# Altium PCB BMD101newconst.PcbDoc
Units mil, origin at the board's own origin, x right, y up, seen from the top; angles counter-clockwise.
Board outline 3995 x 1600 mil, 2 copper layers (Top Layer, Bottom Layer); 42 components, 23 nets, 132 pads, 10 vias.
Unrouted connection lines stored in the file: 3.
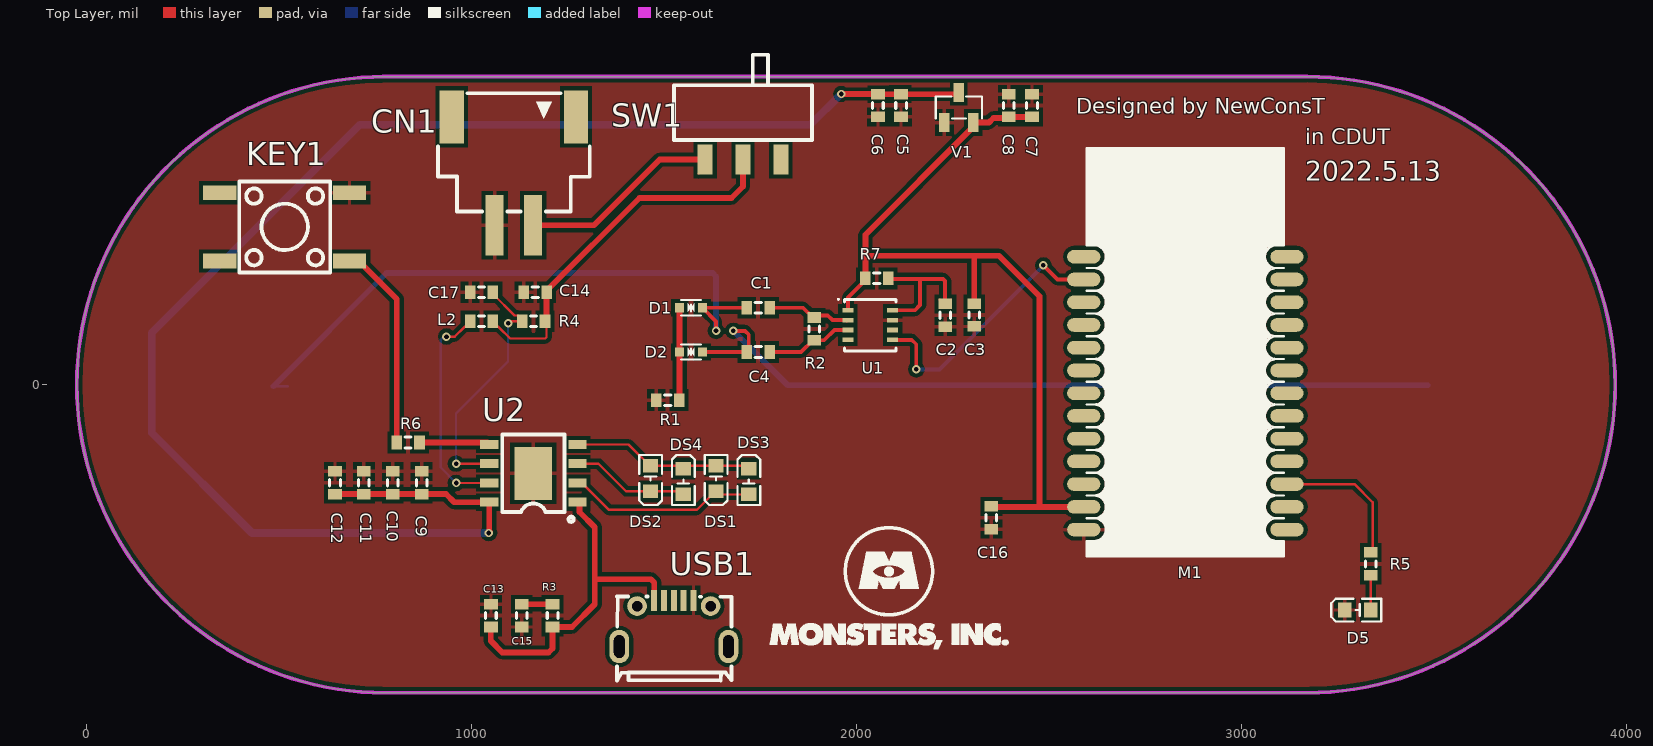
[diagram p0: Top Layer view]
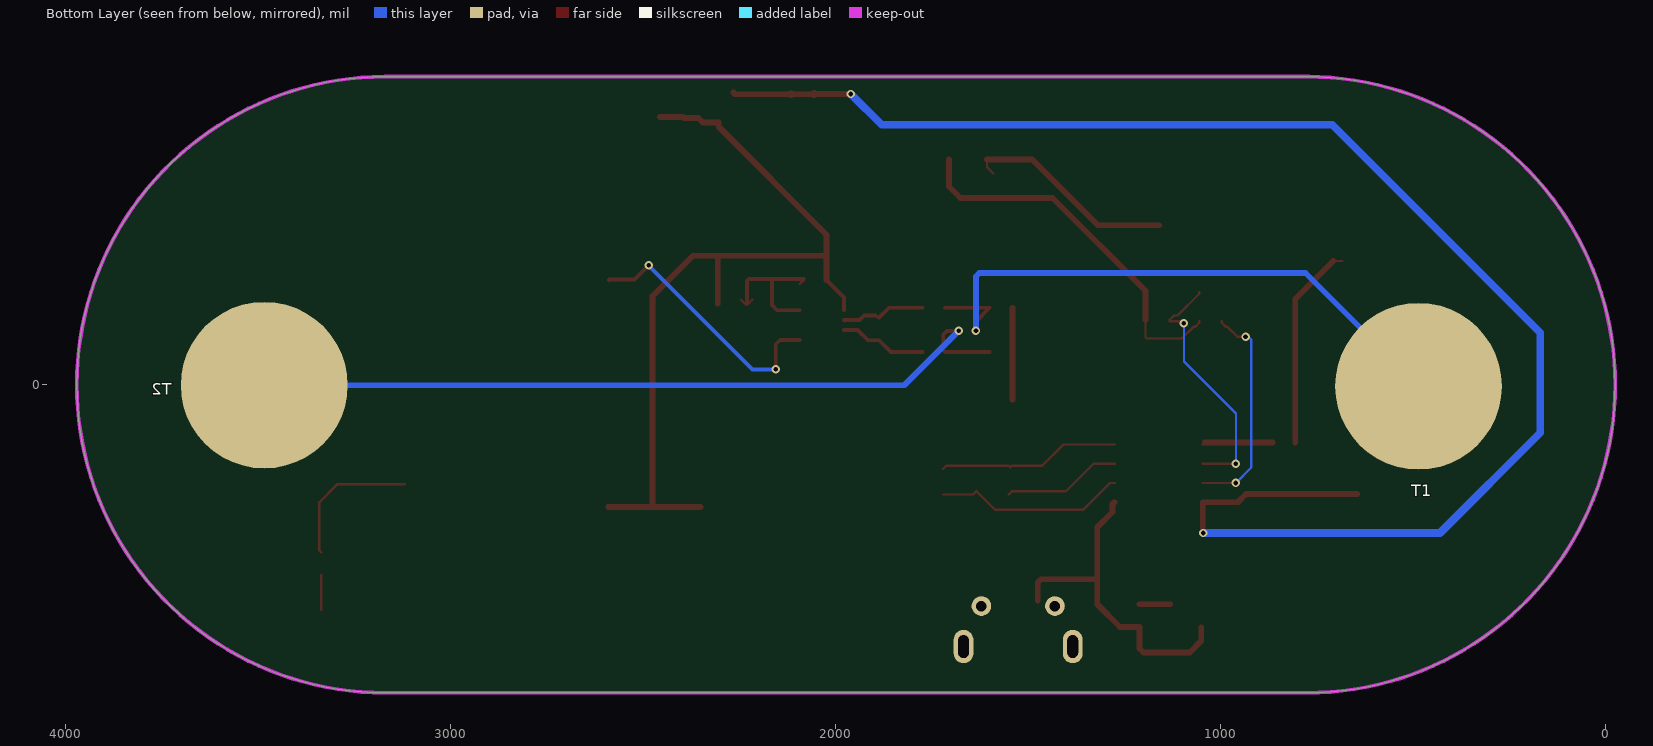
[diagram p1: Bottom Layer view, seen from below]

## Layer stack, top to bottom
Top Solder: solder mask 0.4, Solder Resist, Dk 3.5
Top Layer: signal copper 1.4
Dielectric 1: dielectric 12.6, FR-4, Dk 4.8
Bottom Layer: signal copper 1.4
Bottom Solder: solder mask 0.4, Solder Resist, Dk 3.5

## Board outline
775,-800 cw(c775,0) 775,800 3170,800 cw(c3170,0) 3170,-800

## Design rules (kind name [scope] priority, off if disabled: settings)
Clearance [All] p1: gap=10 ignorepadtopadclearanceinfootprint=TRUE
PolygonConnect [All] p1: thpad.connectstyle=Relief thpad.reliefconductorwidth=10 thpad.reliefentries=4 thpad.polygonreliefangle="90 Angle" thpad.airgapwidth=10 smdpad.connectstyle=Relief smdpad.reliefconductorwidth=10 smdpad.reliefentries=4 smdpad.polygonreliefangle="90 Angle" smdpad.airgapwidth=10 via.connectstyle=Direct via.reliefconductorwidth=10 via.reliefentries=4 via.polygonreliefangle="90 Angle" via.airgapwidth=10
RoutingVias [All] p1: holewidth=12 width=22 viastyle="Through Hole" minholewidth=12 minwidth=22 maxholewidth=12 maxwidth=22
ShortCircuit [InNet('No Net') vs InNet('No Net')] p1: allowed=FALSE
SilkToSilkClearance [All] p1: silktosilkclearance=2
SilkToSolderMaskClearance [IsPad] p1: minsilkscreentomaskgap=2 clearancetoexposedcopper=TRUE
SolderMaskExpansion [All] p1: expansion=4 istentingtop=FALSE
Width 5V [InNet('+5')] p1: maxlimit=20 minlimit=10 preferedwidth=20 minimp=50.000000 maximp=50.000000 favimp=50.000000
Width AGND [InNet('AGND')] p2: maxlimit=15 minlimit=10 preferedwidth=15 minimp=50.000000 maximp=50.000000 favimp=50.000000
Width 3.3v [InNet('+3.3V')] p3: maxlimit=15 minlimit=10 preferedwidth=15 minimp=50.000000 maximp=50.000000 favimp=50.000000
Width PWR [InNetClass('PWR')] p4: maxlimit=50 minlimit=15 preferedwidth=15
Width [All] p5: maxlimit=15 minlimit=6 preferedwidth=6
27 further rules are at their usual default settings.

## Components (designator, comment, footprint, x,y, rotation, side; value= is the part's Value field where it differs from the comment)
C1 "Cap" J1-0603 1744.53,200 r0 top value=1uF
C2 "Cap" J1-0603 2230.47,180.47 r90 top value=10uF
C3 "Cap" J1-0603 2305.47,180.94 r90 top value=10uF
C4 "Cap" J1-0603 1744.53,85 r0 top value=1uF
C5 "25V/106" J1-0603 2115.47,725.01 r90 top value=106
C6 "104" J1-0603 2055.47,725 r270 top value=104/0.1uF
C7 "104" J1-0603 2455.47,725.01 r90 top value=104/0.1uF
C8 "25V/106" J1-0603 2395.47,725 r270 top value=106
C9 "22uF" J1-0603 870.47,-254.53 r270 top
C10 "22uF" J1-0603 795.47,-254.53 r270 top
C11 "22uF" J1-0603 720.47,-254.53 r270 top
C12 "22uF" J1-0603 645.47,-254.53 r270 top
C13 "10uF" J1-0603 1050.47,-599.53 r270 top
C14 "22uF" J1-0603 1165.47,240 r0 top
C15 "10uF" J1-0603 1130.47,-599.53 r90 top
C16 "Cap" J1-0603 2350,-345.47 r90 top value=1uF
C17 "22uF" J1-0603 1025.94,240 r0 top
CN1 "2.54-2P WT" CONN-SMD_2.54-2PWT 1110,555 r180 top
D1 "ESD5V0LB-TP" ESD5V0D5B 1570,200 r0 top
D2 "ESD5V0LB-TP" ESD5V0D5B 1570,85 r180 top
D5 "LED2" LED0603-FD 3301.54,-585 r180 top
DS1 "LED1" LED0603-FD 1635,-243.46 r270 top
DS2 "LED1" LED0603-FD 1465,-243.46 r270 top
DS3 "LED1" LED0603-FD 1720,-251.34 r90 top
DS4 "LED1" LED0603-FD 1550,-251.34 r90 top
KEY1 "K2-1102SP-C4SC-04" KEY-SMD_4P-L6.0-W6.0-P4.50-LS9.5-BL 515,410 r90 top
L2 "Inductor" J1-0603 1025.94,165 r0 top value=1UH
M1 "HC-08" HC-08 2853.78,-445.12 r90 top
R1 "10K" J1-0603 1509.53,-40 r180 top value=0
R2 "Res2" J1-0603 1890.47,145 r90 top value=10K
R3 "2R" J1-0603 1210.47,-599.53 r90 top
R4 "0.5R" J1-0603 1161.42,165 r0 top
R5 "Res2" J1-0603 3335,-465 r90 top value=2.2K
R6 "10K" J1-0603 835.47,-150 r180 top
R7 "10K" J1-0603 2052.33,276.15 r180 top value=0
SW1 "SK-3245S-L1-A" SW-SMD_SK-3245S-L1-A-1 1705.01,585 r0 top
T1 "pad" BATOO#1 485.74,-3.85 r180 bottom
T2 "pad" BATOO#2 3483.14,-1.15 r270 top
U1 "NS BMD101" BMD101 2035.47,155 r0 top
U2 "IP5306" ip5306 1160.47,-230 r90 top
USB1 "MICROUSB" MICRO-USB-SMD_MICROXNJ 1525.47,-620 r0 top
V1 "662K." 662K 2265.47,720 r270 top

## Footprints (in the part's own frame and the unit in brackets; to place one, negate y for a bottom-side part, rotate by r counter-clockwise, add the part's x,y. Pads: shape width x height; smd on the part's side, far side on the other; paste and mask are expansions set on the pad)
662K [mm] "3.3VLDO"
  rect 1.25x0.7 smd: 1(1,-0.95) 2(1,0.95) 3(-1,0)
  silkscreen extent -0.73,-1.53 0.73,1.53
BATOO#1 [mm] "焊接心率纽扣"
  round 11 smd: 1(0,0)
BATOO#2 [mm] "焊接心率纽扣"
  round 11 smd far side: 1(0,0)
BMD101 [mm] "SON, 8-Leads, Body 3.00x3.00mm, Pitch 0.65mm, IPC Medium Density"
  rect 0.75x0.3 smd: 1(-1.47,0.975) 2(-1.47,0.325) 3(-1.47,-0.325) 4(-1.47,-0.975) 5(1.47,-0.975) 6(1.47,-0.325) 7(1.47,0.325) 8(1.47,0.975)
  silkscreen extent -2.15,-1.7 1.7,1.75, body extent -1.55,-1.55 1.55,1.55, height 0.6
CONN-SMD_2.54-2PWT [mm]
  rect 1.2x4 smd: 1(-1.27,3.577) 2(1.27,3.577)
  rect 1.6x3.5 smd: 3(4.1,-3.577) 4(-4.1,-3.577)
  silkscreen extent -5,-5.13 5,2.67
ESD5V0D5B [mm]
  rect 0.6x0.6 smd: 1(-0.75,0) 2(0.75,0)
  silkscreen extent -0.65,-0.5 0.65,0.5
HC-08 [mm] "BLE蓝牙模块"
  oval 0.9x2.2 smd: 1(19.75,6.7) 2(18.25,6.7) 3(16.75,6.7) 4(15.25,6.7) 5(13.75,6.7) 6(12.25,6.7) 7(10.75,6.7) 8(9.25,6.7) 9(7.75,6.7) 10(6.25,6.7) 11(4.75,6.7) 12(3.25,6.7) 13(1.75,6.7) 14(1.75,-6.7) 15(3.25,-6.7) 16(4.75,-6.7) 17(6.25,-6.7) 18(7.75,-6.7) 19(9.25,-6.7) 20(10.75,-6.7) 21(12.25,-6.7) 22(13.75,-6.7) 23(15.25,-6.7) 24(16.75,-6.7) 25(18.25,-6.7) 26(19.75,-6.7)
  silkscreen extent -0.01,-6.5 26.9,6.5
ip5306 [mm] "5v2.4A锂电池管理"
  rect 0.6x1.2 smd: 1(-1.905,-2.908) 2(-0.635,-2.908) 3(0.635,-2.908) 4(1.905,-2.908) 5(1.905,2.908) 6(0.635,2.908) 7(-0.635,2.908) 8(-1.905,2.908)
  rect 3.5x2.5 smd: 9(0,0)
  silkscreen extent -3.2,-2.67 2.55,2.05
J1-0603 [mm] "Chip Resistor, Body 1.6x0.8mm, IPC High Density"
  rect 0.7x0.9 smd: 1(-0.75,0) 2(0.75,0)
  silkscreen extent -0.2,-0.35 0.2,0.35, body extent -0.85,-0.48 0.85,0.48, height 0.9
KEY-SMD_4P-L6.0-W6.0-P4.50-LS9.5-BL [mm]
  rect 0.98x2.2 smd: 1(-2.25,-4.275) 2(-2.25,4.275) 3(2.25,-4.275) 4(2.25,4.275)
  silkscreen extent -3,-3 3,3
LED0603-FD [mm]
  rect 0.9x1 smd: 1(-0.85,0) 2(0.85,0)
  silkscreen extent -1.55,-0.75 1.75,0.75
MICRO-USB-SMD_MICROXNJ [mm]
  rect 0.4x1.4 smd: 1(-1.3,1.521) 2(-0.65,1.521) 3(0,1.521) 4(0.65,1.521) 5(1.3,1.521)
  round 1.3 hole 0.7: 6(2.425,1.149) 9(-2.425,1.149)
  oval 1.3x2.2 hole 0.7 slot 1.5 at 90 deg: 7(3.6,-1.521) 8(-3.6,-1.521)
  silkscreen extent -3.76,-3.78 3.8,1.79
SW-SMD_SK-3245S-L1-A-1 [mm] "卧式三脚开关"
  rect 1x2 smd: 1(-2.5,0) 2(0,0) 3(2.5,0)
  silkscreen extent -4.55,1.29 4.55,6.9

## Part data
C1 C2 C3 C4 C16: "Capacitor", LatestRevisionDate=17-Jul-2002, LatestRevisionNote="Re-released for DXP Platform.", PackageDescription="Radial Cap, Thru-Hole; 2 Leads; 0.3 in Pin Spacing", PackageReference=RAD-0.3, Published=8-Jun-2000, Publisher="Altium Limited"
C5 C6 C7 C8: library part Cap, "Capacitor", LatestRevisionDate=17-Jul-2002, LatestRevisionNote="Re-released for DXP Platform.", PackageDescription="Radial Cap, Thru-Hole; 2 Leads; 0.3 in Pin Spacing", PackageReference=RAD-0.3, Published=8-Jun-2000, Publisher="Altium Limited"
C9 C10 C11 C12 C13 C14 C15 C17: library part C_22, "0805"
CN1: BOM_JLCPCB Part Class="Extended Part", BOM_Manufacturer="SHOU HAN", BOM_Manufacturer Part="2.54-2P WT", BOM_Supplier=LCSC, BOM_Supplier Part=C668622, Contributor=LCSC, spicePre=C, spiceSymbolName="2.54-2P WT"
D1 D2: BOM_JLCPCB Part Class="Extended Part", BOM_Manufacturer="MCC(Micro Commercial Components)", BOM_Manufacturer Part=ESD5V0LB-TP, BOM_Supplier=LCSC, BOM_Supplier Part=C668927, Contributor=LCSC, JLCPCB Part Class="Extended Part", spicePre=D, spiceSymbolName=ESD5V0LB-TP
D5: "Typical RED, GREEN, YELLOW, AMBER GaAs LED", LatestRevisionDate=17-Jul-2002, LatestRevisionNote="Re-released for DXP Platform.", PackageDescription="SM LED; 2 Flat Leads", PackageReference=3.2X1.6X1.1, PackageVersion=Feb-2002, Published=8-Jun-2000, Publisher="Altium Limited"
DS1 DS2 DS3 DS4: library part LED2, "Typical RED, GREEN, YELLOW, AMBER GaAs LED", PackageDocument=Feb-2002, LatestRevisionDate=17-Jul-2002, LatestRevisionNote="Re-released for DXP Platform.", PackageReference=3.2X1.6X1.1, Published=8-Jun-2000, Publisher="Altium Limited"
KEY1: BOM_JLCPCB Part Class="Extended Part", BOM_Manufacturer=HRO, BOM_Manufacturer Part=K2-1102SP-C4SC-04, BOM_Supplier=LCSC, BOM_Supplier Part=C127509, Contributor=LCSC, spicePre=S, spiceSymbolName=K2-1102SP-C4SC-04
M1: "BLE蓝牙通信模块"
R1 R7: library part Res2, "Resistor", LatestRevisionDate=17-Jul-2002, LatestRevisionNote="Re-released for DXP Platform.", PackageDescription="Axial Device, Thru-Hole; 2 Leads; 0.4 in Pin Spacing", PackageReference=AXIAL-0.4, Published=8-Jun-2000, Publisher="Altium Limited"
R2 R5: "Resistor", LatestRevisionDate=17-Jul-2002, LatestRevisionNote="Re-released for DXP Platform.", PackageDescription="Axial Device, Thru-Hole; 2 Leads; 0.4 in Pin Spacing", PackageReference=AXIAL-0.4, Published=8-Jun-2000, Publisher="Altium Limited"
R3 R4 R6: library part R_2
SW1: "卧式滑动开关", BOM_JLCPCB Part Class="Extended Part", BOM_Manufacturer="XKB Enterprise", BOM_Manufacturer Part=SK-3245S-L1-A, BOM_Supplier=LCSC, BOM_Supplier Part=C405951, Contributor=LCSC, spicePre=S, spiceSymbolName=SK-3245S-L1-A
T1 T2: library part BATOO
U1: library part BMD101, "NeuroSky心率芯片"
U2: "SOP8"
USB1: library part MICROusb, BOM_JLCPCB Part Class="Extended Part", BOM_Manufacturer="SHOU HAN", BOM_Manufacturer Part=MicroXNJ, BOM_Supplier=LCSC, BOM_Supplier Part=C404969, Contributor=LCSC, spicePre=U, spiceSymbolName=MICROXNJ
V1: BOM_JLCPCB Part Class="Extended Part", BOM_Manufacturer="Shenzhen Fuman Elec", BOM_Manufacturer Part=662K., BOM_Supplier=LCSC, BOM_Supplier Part=C841298, Contributor=LCSC, spicePre=U, spiceSymbolName=662K.
L2: Code_IEC=1005, Code_JEITA=0402, LatestRevisionDate=29-May-2009, LatestRevisionNote="IPC-7351 Footprint Added.", PackageDescription="Chip Inductor", PackageReference=0402-A, Published=8-Jun-2000, Publisher="Altium Limited"

## Via types
v1: diameter 22, hole 12, Top Layer to Bottom Layer, tented both sides, 10 vias

## Nets (pads, with @x,y where several pads share a name; then routed paths per layer and width w, separated by ;. In a path a pad name is that pad's centre, name@x,y a point inside that pad or via, vN(x,y) a via of type N, cw(c..) or ccw(c..) an arc to the next point about the centre after c; other vN are vias at no path point)
+3.3V: C3.2 C7.1 C8.2 C16.2 M1.12 R7.2 U1.1 V1.2 | length 2188.1
  Top Layer w10: U1.1 1977.6,227.01 R7.2@2022.8,272.21
  Top Layer w15: R7.2@2022.8,272.21 R7.2 2022.8,335 ; C3.2 2305.47,335 ; C16.2@2350,-317.16 2475,-317.16 ; C8.2 2392.96,692.96 2355.26,692.96 2342.92,680.63 V1.2 2302.87,669.8 2022.8,389.73 2022.8,335 ; C8.2 C7.1 ; M1.12 2475,-317.16 ; 2022.8,335 2305.47,335 ; 2305.47,335 2370,335 2475,230 2475,-317.16
+5: C5.2 C6.1 C9.2 C10.2 C11.2 C12.2 U2.8 V1.3 | length 4086.8
  Top Layer w15: C12.2 C11.2 C10.2 C9.2 934.06,-284.06 955,-305 U2.8 v1@1045.97,-383.49 ; v1@1960.24,754.76 C6.1@2055.24,754.76 ; C6.1 C5.2 2260.64,754.53 V1.3
  Top Layer w20: v1(1045,-385) 1045,-384.46 v1@1045.97,-383.49 ; v1(1960,755) v1@1960.24,754.76 ; C6.1@2055.24,754.76 C6.1
  Bottom Layer w20: v1(1045,-385) 430,-385 170,-125 170,135 710,675 1880,675 v1(1960,755)
AGND: D1.1 D2.2 R1.1 | length 125.6
  Top Layer w6: R1.1 R1.1@1540.47,-38.58
  Top Layer w15: R1.1@1540.47,-38.58 D2.2
B_3.7V: CN1.1 SW1.1 | length 560.6
  Top Layer w6: SW1.1@1589.9,548.63 1606.59,565.32 SW1.1
  Top Layer w15: CN1.1 1318.03,414.17 1488.86,585 SW1.1
GND: C2.1 C3.1 C5.1 C6.2 C7.2 C8.1 C9.1 C10.1 C11.1 C12.1 C13.1 C14.1 C15.1 C16.1 C17.1 CN1.2 D5.2 KEY1.3 M1.13 R1.2 U1.7 U2.9 USB1.5 V1.1
NetC1_1: C1.1 D1.2 T1.1 | length 1643.4
  Top Layer w10: v1(1635,140) 1635,164.53 D1.2 C1.1
  Bottom Layer w6: T1.1 T1.1@523.11,-3.85
  Bottom Layer w15: T1.1 779.59,290 1626.21,290 1635,281.21 v1(1635,140)
NetC1_2: C1.2 R2.2 U1.2 | length 225.4
  Top Layer w6: R2.2@1886.53,174.53 R2.2 R2.2@1895.94,180 ; U1.2@1974.8,165 U1.2
  Top Layer w10: C1.2 1861.06,200 R2.2@1886.53,174.53 ; R2.2@1895.94,180 1925,180 1937.2,167.8 U1.2
NetC2_2: C2.2 R7.1 U1.8 | length 411.5
  Top Layer w6: R7.1 2081.86,272.21 R7.1@2092.64,261.43 ; C2.2@2215.76,220.78 2226.53,210 2234.22,210 C2.2@2245,220.78
  Top Layer w10: R7.1@2083.01,275 2165,275 ; U1.8 2151.47,193.39 2165,206.92 2165,275 ; C2.2 2230,210.47 2230,269.14 2224.14,275 2165,275
NetC4_1: C4.1 D2.1 T2.1 | length 2068.3
  Top Layer w6: C4.1 C4.1@1720,90
  Top Layer w10: D2.1 C4.1 ; v1(1680,140) 1710,140 1720,130 C4.1@1720,90
  Bottom Layer w15: v1(1680,140) 1821.15,-1.15 T2.1
NetC4_2: C4.2 R2.1 U1.3 | length 227.2
  Top Layer w6: R2.1@1886.53,115.47 R2.1
  Top Layer w10: C4.2 1856.06,85 R2.1@1886.53,115.47 ; R2.1 1915.47,115.47 1942.2,142.2 U1.3
NetC13_2: C13.2 R3.1 U2.1 USB1.1 | length 891.3
  Top Layer w6: C13.2@1050,-629.53 C13.2
  Top Layer w15: C13.2@1050,-629.53 1050,-665 1080,-695 1200,-695 1210,-685 R3.1@1210,-629.53 ; R3.1 1260.94,-629.06 1320,-570 1320,-505 ; U2.1 1276.21,-305 1280.52,-309.31 1280.52,-330.52 1320,-370 1320,-505 ; USB1.1 1474.66,-559.73 1474.66,-513.79 1465.88,-505 1320,-505
NetC14_2: C14.2 L2.2 R4.2 SW1.2 | length 974.6
  Top Layer w6: L2.2 1055.47,161.06 1066.25,150.28 1070.19,150.28 1100.47,120 1191.49,120 1195,123.51 R4.2@1195,169.06 ; C14.2 C14.2@1195,243.94
  Top Layer w15: R4.2@1195,169.06 C14.2 ; C14.2@1195,243.94 1436.06,485 1675,485 1705,515 SW1.2
NetC15_2: C15.2 R3.2 | length 80
  Top Layer w15: C15.2 R3.2
NetC17_2: C17.2 R4.1 U2.6 | length 662.5
  Top Layer w6: v1(960,-205) U2.6 ; C17.2 1055.47,236.06 1111.82,179.72 1121.11,179.72 1131.89,168.94 R4.1 1100,165 v1(1095,160)
  Bottom Layer w6: v1(960,-205) 960,-75 1095,60 v1@1095,164.52
NetD5_1: D5.1 R5.1 | length 90.5
  Top Layer w6: D5.1 R5.1
NetDS1_1: DS1.1 DS2.1 DS3.2 DS4.2 U2.4 | length 474.3
  Top Layer w6: U2.4 1408.03,-155 1463.03,-210 DS2.1 1542.13,-210 1546.06,-213.94 1550,-210 DS1.1 1712.13,-210 DS3.2
NetDS1_2: DS1.2 DS3.1 U2.2 | length 497.2
  Top Layer w6: U2.2 1286.78,-255 1356.78,-325 1584.96,-325 1633.03,-276.93 DS1.2 1642.87,-284.8 DS3.1
NetDS2_2: DS2.2 DS4.1 U2.3 | length 308.1
  Top Layer w6: U2.3 1330,-205 1401.93,-276.93 DS2.2 1542.13,-276.93 DS4.1
NetKEY1_1: KEY1.1 R6.2 | length 536.3
  Top Layer w6: KEY1.1 KEY1.1@707.32,321.42
  Top Layer w15: KEY1.1@707.32,321.42 805.94,222.79 R6.2
NetL2_1: L2.1 U2.7 | length 573
  Top Layer w6: v1(935,125) 956.42,125 981.7,150.28 985.64,150.28 996.42,161.06 L2.1 ; v1(960,-255) U2.7
  Bottom Layer w6: v1(935,125) 930.67,125 925.87,120.2 923.51,120.2 920,116.69 920,-215 v1(960,-255)
NetM1_16: M1.16 R5.2 | length 374.4
  Top Layer w6: M1.16 3293.11,-258.11 3340,-305 3340,-430.47 R5.2
NetR6_1: R6.1 U2.5 | length 183
  Top Layer w6: U2.5@1040.97,-150 U2.5
  Top Layer w15: R6.1 U2.5@1040.97,-150
TX: M1.2 U1.5 | length 694.9
  Top Layer w6: M1.2@2588.31,271.69 M1.2
  Top Layer w10: U1.5 2143.39,116.61 2155,105 v1(2155,40) ; v1(2485,310) 2521.61,273.39 2586.61,273.39 M1.2@2588.31,271.69
  Bottom Layer w10: v1(2155,40) 2215,40 v1(2485,310)
pads on no net: CN1.3 CN1.4 KEY1.2 KEY1.4 M1.1 M1.3 M1.4 M1.5 M1.6 M1.7 M1.8 M1.9 M1.10 M1.11 M1.14 M1.15 M1.17 M1.18 M1.19 M1.20 M1.21 M1.22 M1.23 M1.24 M1.25 M1.26 SW1.3 U1.4 U1.6 USB1.2 USB1.3 USB1.4 USB1.6 USB1.7 USB1.8 USB1.9
copper on no net: | length 115
  Top Layer w15: 1540.47,85 1540.47,200

## Polygon pours and split planes (outlines as drawn)
GND on Top Layer "TOP_GND" (solid, remove dead copper, pour order 0): 775,-800 cw(c775,0) 775,800 3170,800 cw(c3170,0) 3170,-800
GND on Bottom Layer "BOT" (solid, remove dead copper, pour order 1): 775,-800 cw(c775,0) 775,800 3170,800 cw(c3170,0) 3170,-800

## Keep-outs
Keep-Out Layer:
  lines w10: 770,-800 3165,-800 ; 770,800 3165,800 ; 775,-800 cw(c775,0) 775,800 ; 3170,-800 ccw(c3170,0) 3170,800

## Silkscreen, mask and mechanical layers (free items; w line width, h text height)
Top Overlay:
  drawing of 16 lines, arcs and shapes, not listed
  text "Designed by NewConsT" at 2570.13,703.33 h40
  text "in CDUT" at 3165,625 h40
  text "2022.5.13" at 3165,530 h50